# Altium PCB led_panel_181003.PcbDoc
Units mm, origin at the board's own origin, x right, y up, seen from the top; angles counter-clockwise.
Board outline 105.41 x 81.28 mm, 2 copper layers (Top Layer, Bottom Layer); 40 components, 39 nets, 915 pads, 13 vias.
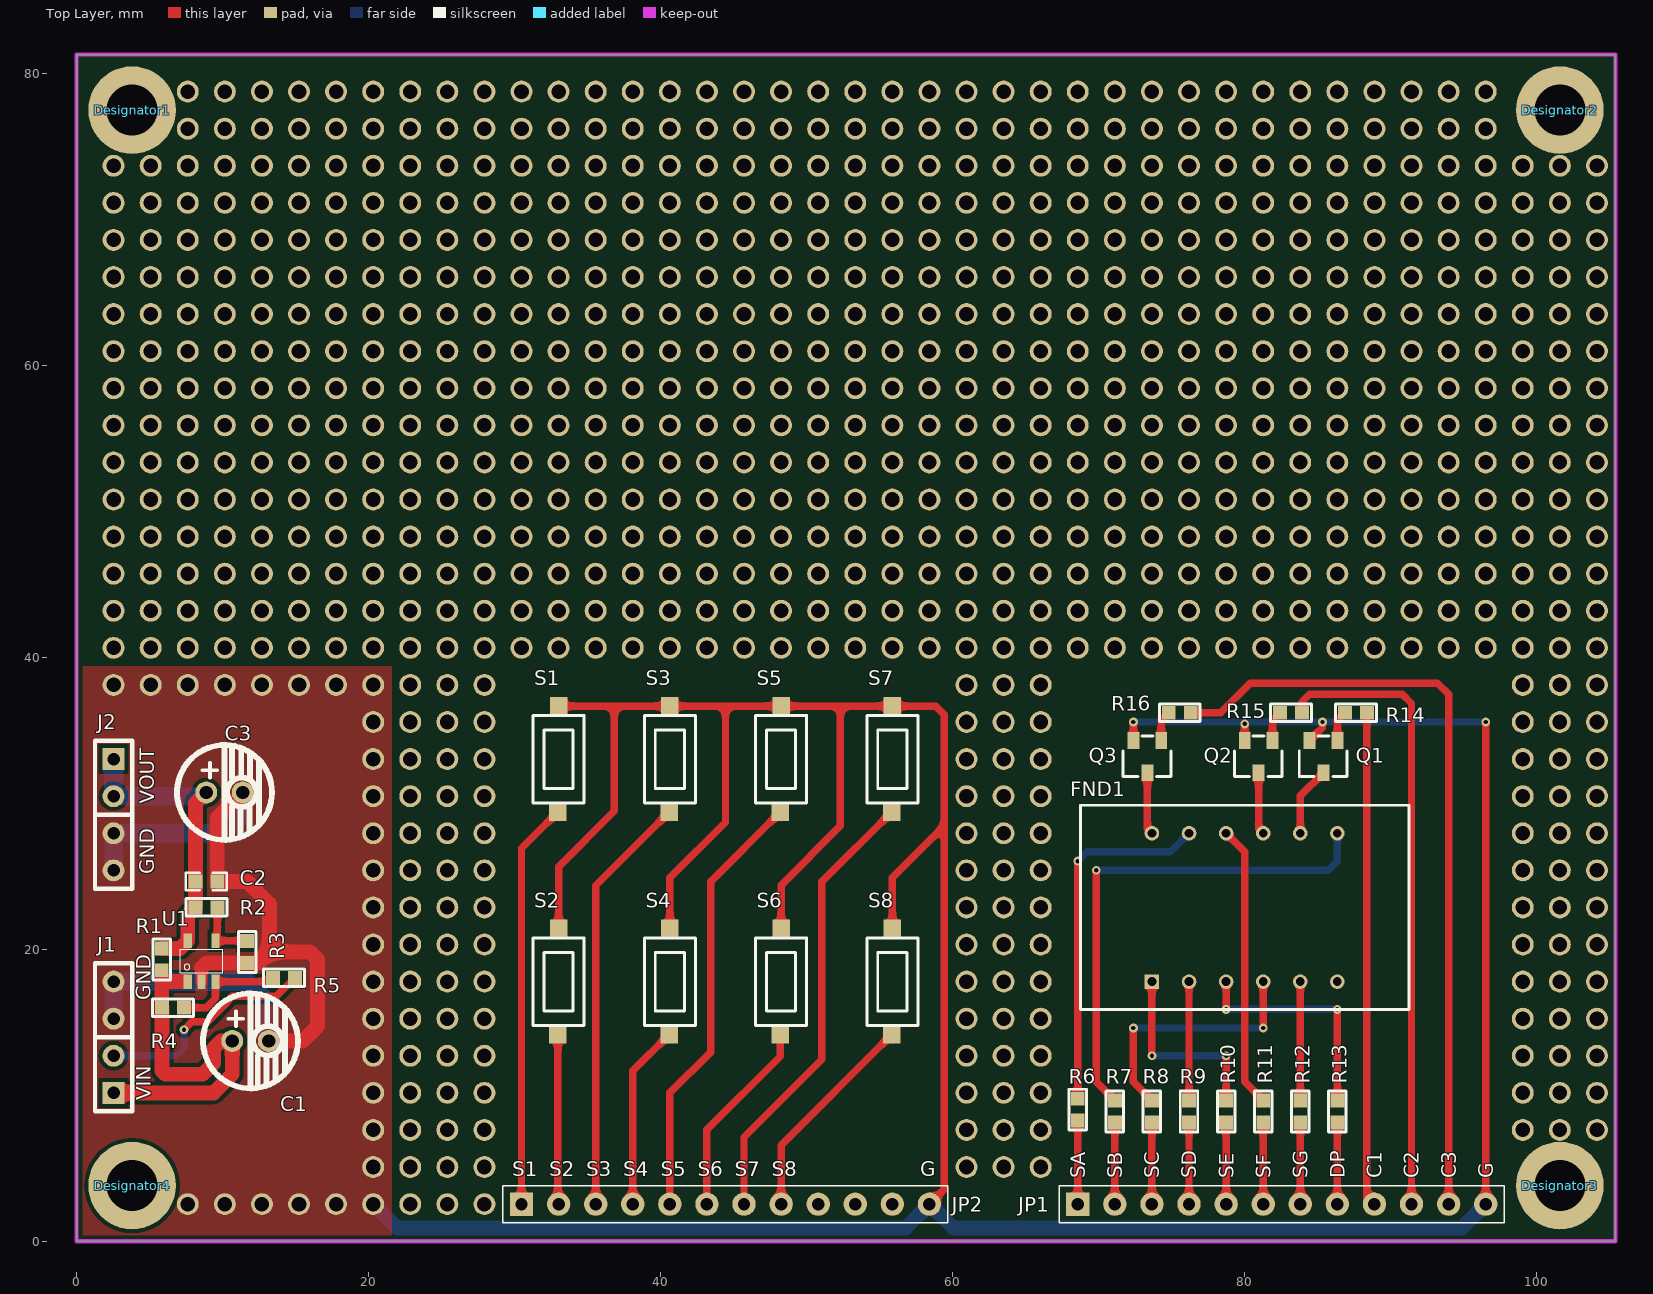
[diagram p0: Top Layer view]
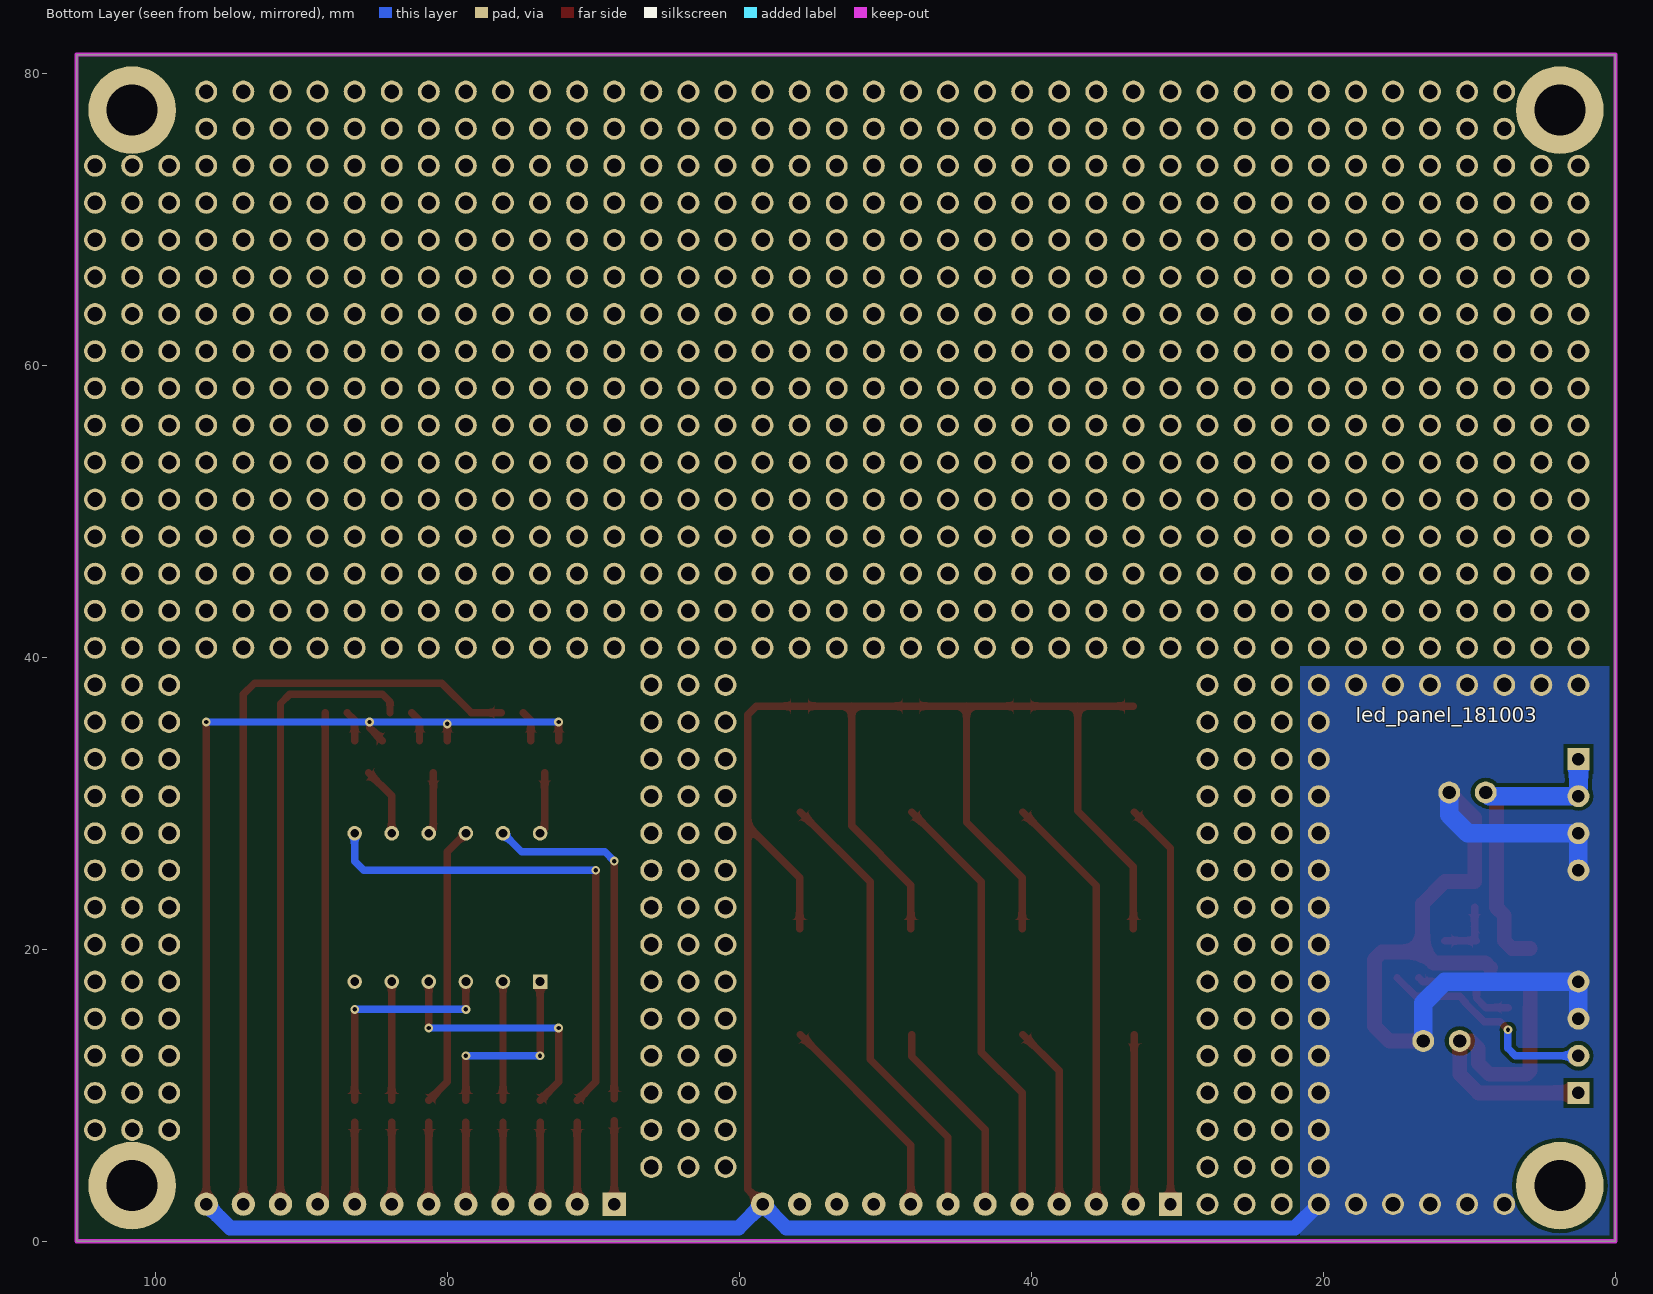
[diagram p1: Bottom Layer view, seen from below]
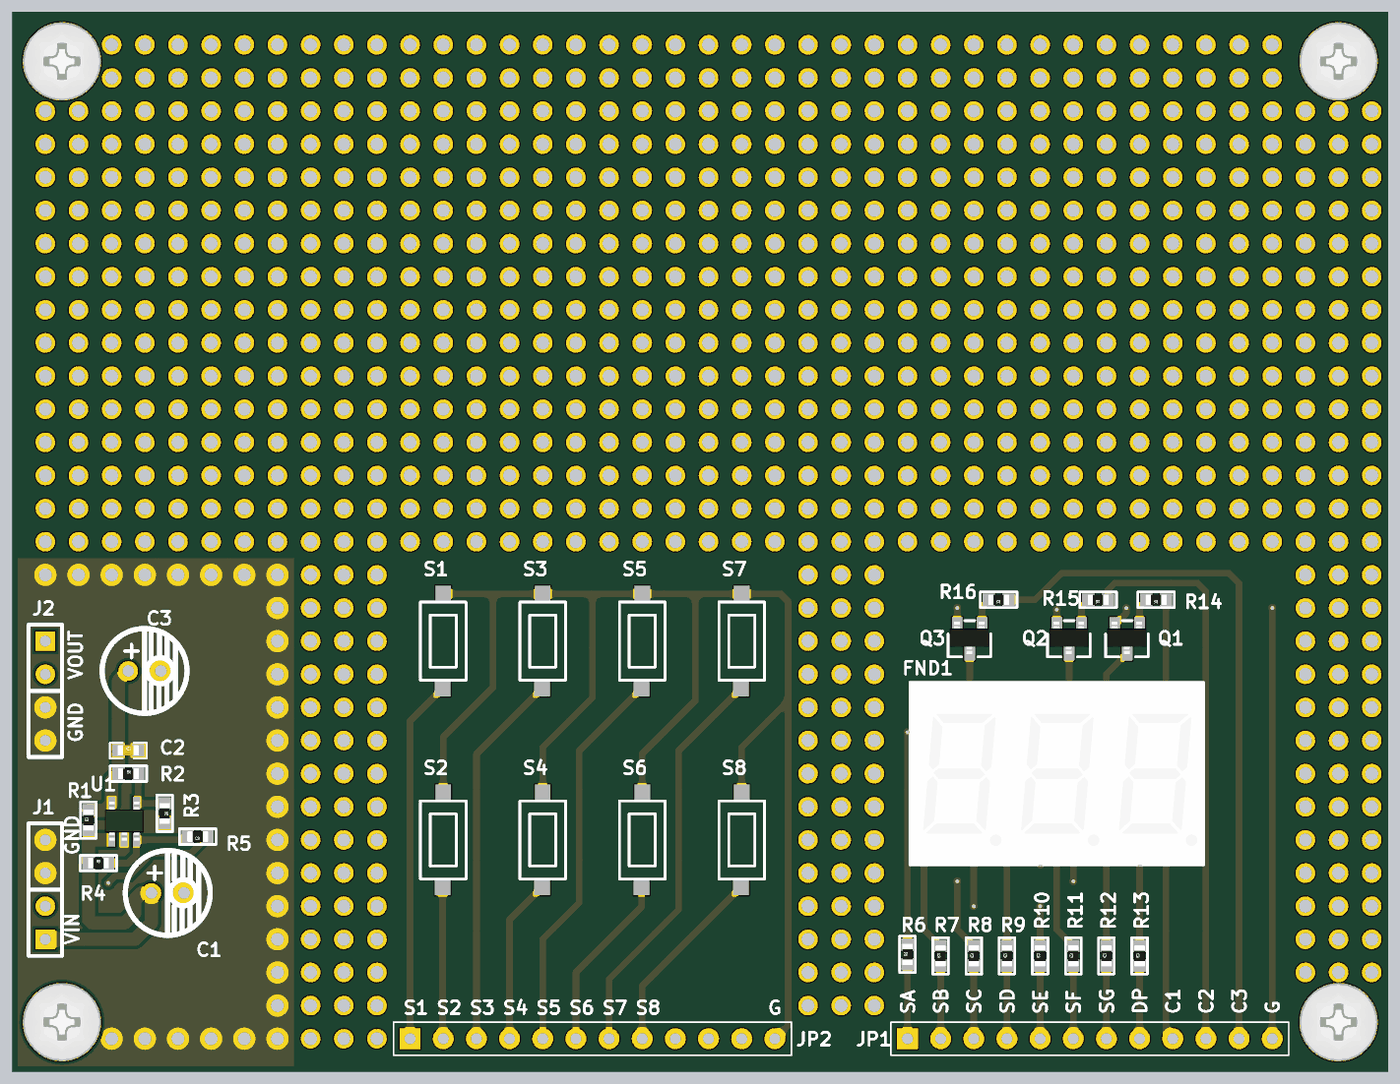
[diagram p2: 3D render of the assembled board from above, using the file's embedded part models]

## Layer stack, top to bottom
Top Solder: solder mask 0.0102, Solder Resist, Dk 3.5
Top Layer: signal copper 0.0356
Dielectric 1: dielectric 0.32, FR-4, Dk 4.8
Bottom Layer: signal copper 0.0356
Bottom Solder: solder mask 0.0102, Solder Resist, Dk 3.5

## Board outline
0,0 105.41,0 105.41,81.28 0,81.28

## Design rules (kind name [scope] priority, off if disabled: settings)
Clearance [All] p1: gap=0.254
PolygonConnect [All] p1: connectstyle=Direct reliefconductorwidth=0.254 reliefentries=4 polygonreliefangle="90 Angle" airgapwidth=0.254
RoutingVias [All] p1: holewidth=0.3 width=0.6 viastyle="Through Hole" minholewidth=0.3 minwidth=0.6 maxholewidth=2 maxwidth=3
SolderMaskExpansion [All] p1: expansion=0.102
Width [All] p1: maxlimit=2.54 minlimit=0.254 preferedwidth=0.254
30 further rules are at their usual default settings.

## Components (designator, comment, footprint, x,y, rotation, side; value= is the part's Value field where it differs from the comment)
C1 "10UF" CAPPRV250-650X1118 10.668,13.716 r0 top
C2 "10uF" C-0603 8.89,24.638 r0 top
C3 "10UF" CAPPRV250-650X1118 8.89,30.734 r0 top
Designator1 "Comment" CON1-M3 3.81,77.47 r0 top
Designator2 "Comment" CON1-M3 101.6,77.47 r0 top
Designator3 "Comment" CON1-M3 101.6,3.81 r0 top
Designator4 "Comment" CON1-M3 3.81,3.81 r0 top
FND1 "SP10262" D-7SEG-0.36-3DIG 80.01,22.86 r0 top
J1 "CON4, 2.54mm" CON-4X1-DIP-2.54mm 2.54,10.16 r270 top
J2 "CON4, 2.54mm" CON-4X1-DIP-2.54mm 2.54,33.02 r90 top
JP1 "CON12,2.54mm" CON-12X1-DIP-2.54mm 68.58,2.54 r0 top
JP2 "CON12,2.54mm" CON-12X1-DIP-2.54mm 30.48,2.54 r0 top
Q1 "MMBT4401" SOT-23-TR 85.41,33.179 r180 top
Q2 "MMBT4401" SOT-23-TR 80.965,33.179 r180 top
Q3 "MMBT4401" SOT-23-TR 73.345,33.179 r180 top
R1 "0R0" R-0603 5.842,19.304 r90 top
R2 "0R0" R-0603 8.902,22.86 r0 top
R3 "0R0" R-0603 11.684,19.812 r270 top
R4 "0R0" R-0603 6.604,16.002 r0 top
R5 "0R0" R-0603 14.212,18.034 r180 top
R6 "0R0" R-0603 68.58,9.005 r90 top
R7 "0R0" R-0603 71.12,8.89 r90 top
R8 "0R0" R-0603 73.66,8.89 r90 top
R9 "0R0" R-0603 76.2,8.89 r90 top
R10 "0R0" R-0603 78.74,8.89 r90 top
R11 "0R0" R-0603 81.28,8.89 r90 top
R12 "0R0" R-0603 83.82,8.89 r90 top
R13 "0R0" R-0603 86.36,8.89 r90 top
R14 "0R0" R-0603 87.63,36.195 r180 top
R15 "0R0" R-0603 83.185,36.195 r180 top
R16 "0R0" R-0603 75.565,36.195 r180 top
S1 "TS1101" SW-TS1101 33.02,33.02 r270 top
S2 "TS1101" SW-TS1101 33.02,17.78 r270 top
S3 "TS1101" SW-TS1101 40.64,33.02 r270 top
S4 "TS1101" SW-TS1101 40.64,17.78 r270 top
S5 "TS1101" SW-TS1101 48.26,33.02 r270 top
S6 "TS1101" SW-TS1101 48.26,17.78 r270 top
S7 "TS1101" SW-TS1101 55.88,33.02 r270 top
S8 "TS1101" SW-TS1101 55.88,17.78 r270 top
U1 "G2920T11" SOT-23-5 7.62,17.78 r0 top

## Footprints (in the part's own frame and the unit in brackets; to place one, negate y for a bottom-side part, rotate by r counter-clockwise, add the part's x,y. Pads: shape width x height; smd on the part's side, far side on the other; paste and mask are expansions set on the pad)
C-0603 [mm] "Chip Capacitor, Body 1.6x0.8mm, IPC High Density"
  rect 0.95x0.95 smd: 1(-0.75,0) 2(0.75,0)
  silkscreen extent -1.4,-0.6 1.4,0.6, body extent -0.8,-0.4 0.8,0.4, height 0.3
CAPPRV250-650X1118 [mm]
  round 1.5 hole 0.9: 1(0,0) 2(2.5,0)
  silkscreen extent -2,-3.25 4.5,3.25
CON1-M3 [mm] "M3 Hole"
  round 6 hole 3.5: 1(0,0)
  body extent -3,-3 3,3, height 2.36
CON-4X1-DIP-2.54mm [mm]
  rect 1.5x1.5 hole 0.85: 1(0,0)
  round 1.5 hole 0.85: 2(-2.54,0) 3(-5.08,0) 4(-7.62,0)
  silkscreen extent -8.89,-1.27 1.27,1.27
CON-12X1-DIP-2.54mm [mm]
  rect 1.6x1.6 hole 0.85: 1(0,0)
  round 1.6 hole 0.85: 2(2.54,0) 3(5.08,0) 4(7.62,0) 5(10.16,0) 6(12.7,0) 7(15.24,0) 8(17.78,0) 9(20.32,0) 10(22.86,0) 11(25.4,0) 12(27.94,0)
  silkscreen extent -1.27,-1.27 29.21,1.27
D-7SEG-0.36-3DIG [mm] "0.36 inch 3 digit LED, SP 10361"
  rect 1x1 hole 0.6 unplated: 1(-6.35,-5.08)
  round 1 hole 0.6 unplated: 2(-3.81,-5.08) 3(-1.27,-5.08) 4(1.27,-5.08) 5(3.81,-5.08) 6(6.35,-5.08) 7(6.35,5.08) 8(3.81,5.08) 9(1.27,5.08) 10(-1.27,5.08) 11(-3.81,5.08) 12(-6.35,5.08)
  silkscreen extent -11.25,-7 11.25,7, body extent -11.25,-7 11.25,7, height 7.2
R-0603 [mm]
  rect 0.95x0.95 smd: 1(-0.75,0) 2(0.75,0)
  silkscreen extent -1.4,-0.6 1.4,0.6, body extent -0.8,-0.4 0.8,0.4, height 0.3
SOT-23-5 [mm]
  rect 0.55x1 smd: 1(0,0) 2(0.95,0) 3(1.9,0) 4(1.9,2.8) 5(0,2.8)
  silkscreen extent -0.5,0.6 2.4,2.2, body extent -0.53,-0.05 2.47,2.95, height 1.5
SOT-23-TR [mil]
  rect 32x45 smd: 1(-37.41,-43.76) 2(37.39,-43.76) 3(-0.01,42.86)
  silkscreen extent -64,-55 65,54, body extent -58,-53 60,45, height 41
SW-TS1101 [mm] "6*3.5*4.3mm"
  rect 1.25x1.2 smd: 1(-3.625,0) 2(3.625,-0.05)
  silkscreen extent -3,-1.75 3,1.75, body extent -3,-1.75 3,1.73, height 4.3

## Free pads (board coordinates)
  round 1.5 hole 1: 2(2.54,38.1) 2(2.54,40.64) 2(2.54,43.18) 2(2.54,45.72) 2(2.54,48.26) 2(2.54,50.8) 2(2.54,53.34) 2(2.54,55.88) 2(2.54,58.42) 2(2.54,60.96) 2(2.54,63.5) 2(2.54,66.04) 2(2.54,68.58) 2(2.54,71.12) 2(2.54,73.66) 2(7.62,40.64) 2(7.62,43.18) 2(7.62,45.72) 2(7.62,48.26) 2(7.62,50.8) 2(7.62,53.34) 2(7.62,55.88) 2(7.62,58.42) 2(7.62,60.96) 2(7.62,63.5) 2(7.62,66.04) 2(7.62,68.58) 2(7.62,71.12) 2(7.62,73.66) 2(7.62,76.2) 2(7.62,78.74) 2(10.16,40.64) 2(10.16,43.18) 2(10.16,45.72) 2(10.16,48.26) 2(10.16,50.8) 2(10.16,53.34) 2(10.16,55.88) 2(10.16,58.42) 2(10.16,60.96) 2(10.16,63.5) 2(10.16,66.04) 2(10.16,68.58) 2(10.16,71.12) 2(10.16,73.66) 2(10.16,76.2) 2(10.16,78.74) 2(15.24,38.1) 2(22.86,2.54) 2(22.86,5.08) 2(22.86,7.62) 2(22.86,10.16) 2(22.86,12.7) 2(22.86,15.24) 2(22.86,17.78) 2(22.86,20.32) 2(22.86,22.86) 2(22.86,25.4) 2(22.86,27.94) 2(22.86,30.48) 2(22.86,33.02) 2(22.86,35.56) 2(22.86,38.1) 2(22.86,40.64) 2(22.86,43.18) 2(22.86,45.72) 2(22.86,48.26) 2(22.86,50.8) 2(22.86,53.34) 2(22.86,55.88) 2(22.86,58.42) 2(22.86,60.96) 2(22.86,63.5) 2(22.86,66.04) 2(22.86,68.58) 2(22.86,71.12) 2(22.86,73.66) 2(22.86,76.2) 2(22.86,78.74) 2(35.56,40.64) 2(35.56,43.18) 2(35.56,45.72) 2(35.56,48.26) 2(35.56,50.8) 2(35.56,53.34) 2(35.56,55.88) 2(35.56,58.42) 2(35.56,60.96) 2(35.56,63.5) 2(35.56,66.04) 2(35.56,68.58) 2(35.56,71.12) 2(35.56,73.66) 2(35.56,76.2) 2(35.56,78.74) 2(48.26,40.64) 2(48.26,43.18) 2(48.26,45.72) 2(48.26,48.26) 2(48.26,50.8) 2(48.26,53.34) 2(48.26,55.88) 2(48.26,58.42) 2(48.26,60.96) 2(48.26,63.5) 2(48.26,66.04) 2(48.26,68.58) 2(48.26,71.12) 2(48.26,73.66) 2(48.26,76.2) 2(48.26,78.74) 2(60.96,5.08) 2(60.96,7.62) 2(60.96,10.16) 2(60.96,12.7) 2(60.96,15.24) 2(60.96,17.78) 2(60.96,20.32) 2(60.96,22.86) 2(60.96,25.4) 2(60.96,27.94) 2(60.96,30.48) 2(60.96,33.02) 2(60.96,35.56) 2(60.96,38.1) 2(60.96,40.64) 2(60.96,43.18) 2(60.96,45.72) 2(60.96,48.26) 2(60.96,50.8) 2(60.96,53.34) 2(60.96,55.88) 2(60.96,58.42) 2(60.96,60.96) 2(60.96,63.5) 2(60.96,66.04) 2(60.96,68.58) 2(60.96,71.12) 2(60.96,73.66) 2(60.96,76.2) 2(60.96,78.74) 2(73.66,40.64) 2(73.66,43.18) 2(73.66,45.72) 2(73.66,48.26) 2(73.66,50.8) 2(73.66,53.34) 2(73.66,55.88) 2(73.66,58.42) 2(73.66,60.96) 2(73.66,63.5) 2(73.66,66.04) 2(73.66,68.58) 2(73.66,71.12) 2(73.66,73.66) 2(73.66,76.2) 2(73.66,78.74) 2(86.36,40.64) 2(86.36,43.18) 2(86.36,45.72) 2(86.36,48.26) 2(86.36,50.8) 2(86.36,53.34) 2(86.36,55.88) 2(86.36,58.42) 2(86.36,60.96) 2(86.36,63.5) 2(86.36,66.04) 2(86.36,68.58) 2(86.36,71.12) 2(86.36,73.66) 2(86.36,76.2) 2(86.36,78.74) 2(99.06,7.62) 2(99.06,10.16) 2(99.06,12.7) 2(99.06,15.24) 2(99.06,17.78) 2(99.06,20.32) 2(99.06,22.86) 2(99.06,25.4) 2(99.06,27.94) 2(99.06,30.48) 2(99.06,33.02) 2(99.06,35.56) 2(99.06,38.1) 2(99.06,40.64) 2(99.06,43.18) 2(99.06,45.72) 2(99.06,48.26) 2(99.06,50.8) 2(99.06,53.34) 2(99.06,55.88) 2(99.06,58.42) 2(99.06,60.96) 2(99.06,63.5) 2(99.06,66.04) 2(99.06,68.58) 2(99.06,71.12) 2(99.06,73.66) 2(101.6,7.62) 2(101.6,10.16) 2(101.6,12.7) 2(101.6,15.24) 2(101.6,17.78) 2(101.6,20.32) 2(101.6,22.86) 2(101.6,25.4) 2(101.6,27.94) 2(101.6,30.48) 2(101.6,33.02) 2(101.6,35.56) 2(101.6,38.1) 2(101.6,40.64) 2(101.6,43.18) 2(101.6,45.72) 2(101.6,48.26) 2(101.6,50.8) 2(101.6,53.34) 2(101.6,55.88) 2(101.6,58.42) 2(101.6,60.96) 2(101.6,63.5) 2(101.6,66.04) 2(101.6,68.58) 2(101.6,71.12) 2(101.6,73.66) 2(104.14,7.62) 2(104.14,10.16) 2(104.14,12.7) 2(104.14,15.24) 2(104.14,17.78) 2(104.14,20.32) 2(104.14,22.86) 2(104.14,25.4) 2(104.14,27.94) 2(104.14,30.48) 2(104.14,33.02) 2(104.14,35.56) 2(104.14,38.1) 2(104.14,40.64) 2(104.14,43.18) 2(104.14,45.72) 2(104.14,48.26) 2(104.14,50.8) 2(104.14,53.34) 2(104.14,55.88) 2(104.14,58.42) 2(104.14,60.96) 2(104.14,63.5) 2(104.14,66.04) 2(104.14,68.58) 2(104.14,71.12) 2(104.14,73.66) 3(5.08,38.1) 3(5.08,40.64) 3(5.08,43.18) 3(5.08,45.72) 3(5.08,48.26) 3(5.08,50.8) 3(5.08,53.34) 3(5.08,55.88) 3(5.08,58.42) 3(5.08,60.96) 3(5.08,63.5) 3(5.08,66.04) 3(5.08,68.58) 3(5.08,71.12) 3(5.08,73.66) 3(12.7,40.64) 3(12.7,43.18) 3(12.7,45.72) 3(12.7,48.26) 3(12.7,50.8) 3(12.7,53.34) 3(12.7,55.88) 3(12.7,58.42) 3(12.7,60.96) 3(12.7,63.5) 3(12.7,66.04) 3(12.7,68.58) 3(12.7,71.12) 3(12.7,73.66) 3(12.7,76.2) 3(12.7,78.74) 3(17.78,38.1) 3(25.4,2.54) 3(25.4,5.08) 3(25.4,7.62) 3(25.4,10.16) 3(25.4,12.7) 3(25.4,15.24) 3(25.4,17.78) 3(25.4,20.32) 3(25.4,22.86) 3(25.4,25.4) 3(25.4,27.94) 3(25.4,30.48) 3(25.4,33.02) 3(25.4,35.56) 3(25.4,38.1) 3(25.4,40.64) 3(25.4,43.18) 3(25.4,45.72) 3(25.4,48.26) 3(25.4,50.8) 3(25.4,53.34) 3(25.4,55.88) 3(25.4,58.42) 3(25.4,60.96) 3(25.4,63.5) 3(25.4,66.04) 3(25.4,68.58) 3(25.4,71.12) 3(25.4,73.66) 3(25.4,76.2) 3(25.4,78.74) 3(38.1,40.64) 3(38.1,43.18) 3(38.1,45.72) 3(38.1,48.26) 3(38.1,50.8) 3(38.1,53.34) 3(38.1,55.88) 3(38.1,58.42) 3(38.1,60.96) 3(38.1,63.5) 3(38.1,66.04) 3(38.1,68.58) 3(38.1,71.12) 3(38.1,73.66) 3(38.1,76.2) 3(38.1,78.74) 3(50.8,40.64) 3(50.8,43.18) 3(50.8,45.72) 3(50.8,48.26) 3(50.8,50.8) 3(50.8,53.34) 3(50.8,55.88) 3(50.8,58.42) 3(50.8,60.96) 3(50.8,63.5) 3(50.8,66.04) 3(50.8,68.58) 3(50.8,71.12) 3(50.8,73.66) 3(50.8,76.2) 3(50.8,78.74) 3(63.5,5.08) 3(63.5,7.62) 3(63.5,10.16) 3(63.5,12.7) 3(63.5,15.24) 3(63.5,17.78) 3(63.5,20.32) 3(63.5,22.86) 3(63.5,25.4) 3(63.5,27.94) 3(63.5,30.48) 3(63.5,33.02) 3(63.5,35.56) 3(63.5,38.1) 3(63.5,40.64) 3(63.5,43.18) 3(63.5,45.72) 3(63.5,48.26) 3(63.5,50.8) 3(63.5,53.34) 3(63.5,55.88) 3(63.5,58.42) 3(63.5,60.96) 3(63.5,63.5) 3(63.5,66.04) 3(63.5,68.58) 3(63.5,71.12) 3(63.5,73.66) 3(63.5,76.2) 3(63.5,78.74) 3(76.2,40.64) 3(76.2,43.18) 3(76.2,45.72) 3(76.2,48.26) 3(76.2,50.8) 3(76.2,53.34) 3(76.2,55.88) 3(76.2,58.42) 3(76.2,60.96) 3(76.2,63.5) 3(76.2,66.04) 3(76.2,68.58) 3(76.2,71.12) 3(76.2,73.66) 3(76.2,76.2) 3(76.2,78.74) 3(88.9,40.64) 3(88.9,43.18) 3(88.9,45.72) 3(88.9,48.26) 3(88.9,50.8) 3(88.9,53.34) 3(88.9,55.88) 3(88.9,58.42) 3(88.9,60.96) 3(88.9,63.5) 3(88.9,66.04) 3(88.9,68.58) 3(88.9,71.12) 3(88.9,73.66) 3(88.9,76.2) 3(88.9,78.74) 4(7.62,38.1) 4(15.24,40.64) 4(15.24,43.18) 4(15.24,45.72) 4(15.24,48.26) 4(15.24,50.8) 4(15.24,53.34) 4(15.24,55.88) 4(15.24,58.42) 4(15.24,60.96) 4(15.24,63.5) 4(15.24,66.04) 4(15.24,68.58) 4(15.24,71.12) 4(15.24,73.66) 4(15.24,76.2) 4(15.24,78.74) 4(20.32,38.1) 4(27.94,2.54) 4(27.94,5.08) 4(27.94,7.62) 4(27.94,10.16) 4(27.94,12.7) 4(27.94,15.24) 4(27.94,17.78) 4(27.94,20.32) 4(27.94,22.86) 4(27.94,25.4) 4(27.94,27.94) 4(27.94,30.48) 4(27.94,33.02) 4(27.94,35.56) 4(27.94,38.1) 4(27.94,40.64) 4(27.94,43.18) 4(27.94,45.72) 4(27.94,48.26) 4(27.94,50.8) 4(27.94,53.34) 4(27.94,55.88) 4(27.94,58.42) 4(27.94,60.96) 4(27.94,63.5) 4(27.94,66.04) 4(27.94,68.58) 4(27.94,71.12) 4(27.94,73.66) 4(27.94,76.2) 4(27.94,78.74) 4(40.64,40.64) 4(40.64,43.18) 4(40.64,45.72) 4(40.64,48.26) 4(40.64,50.8) 4(40.64,53.34) 4(40.64,55.88) 4(40.64,58.42) 4(40.64,60.96) 4(40.64,63.5) 4(40.64,66.04) 4(40.64,68.58) 4(40.64,71.12) 4(40.64,73.66) 4(40.64,76.2) 4(40.64,78.74) 4(53.34,40.64) 4(53.34,43.18) 4(53.34,45.72) 4(53.34,48.26) 4(53.34,50.8) 4(53.34,53.34) 4(53.34,55.88) 4(53.34,58.42) 4(53.34,60.96) 4(53.34,63.5) 4(53.34,66.04) 4(53.34,68.58) 4(53.34,71.12) 4(53.34,73.66) 4(53.34,76.2) 4(53.34,78.74) 4(66.04,5.08) 4(66.04,7.62) 4(66.04,10.16) 4(66.04,12.7) 4(66.04,15.24) 4(66.04,17.78) 4(66.04,20.32) 4(66.04,22.86) 4(66.04,25.4) 4(66.04,27.94) 4(66.04,30.48) 4(66.04,33.02) 4(66.04,35.56) 4(66.04,38.1) 4(66.04,40.64) 4(66.04,43.18) 4(66.04,45.72) 4(66.04,48.26) 4(66.04,50.8) 4(66.04,53.34) 4(66.04,55.88) 4(66.04,58.42) 4(66.04,60.96) 4(66.04,63.5) 4(66.04,66.04) 4(66.04,68.58) 4(66.04,71.12) 4(66.04,73.66) 4(66.04,76.2) 4(66.04,78.74) 4(78.74,40.64) 4(78.74,43.18) 4(78.74,45.72) 4(78.74,48.26) 4(78.74,50.8) 4(78.74,53.34) 4(78.74,55.88) 4(78.74,58.42) 4(78.74,60.96) 4(78.74,63.5) 4(78.74,66.04) 4(78.74,68.58) 4(78.74,71.12) 4(78.74,73.66) 4(78.74,76.2) 4(78.74,78.74) 4(91.44,40.64) 4(91.44,43.18) 4(91.44,45.72) 4(91.44,48.26) 4(91.44,50.8) 4(91.44,53.34) 4(91.44,55.88) 4(91.44,58.42) 4(91.44,60.96) 4(91.44,63.5) 4(91.44,66.04) 4(91.44,68.58) 4(91.44,71.12) 4(91.44,73.66) 4(91.44,76.2) 4(91.44,78.74) 5(10.16,38.1) 5(17.78,40.64) 5(17.78,43.18) 5(17.78,45.72) 5(17.78,48.26) 5(17.78,50.8) 5(17.78,53.34) 5(17.78,55.88) 5(17.78,58.42) 5(17.78,60.96) 5(17.78,63.5) 5(17.78,66.04) 5(17.78,68.58) 5(17.78,71.12) 5(17.78,73.66) 5(17.78,76.2) 5(17.78,78.74) 5(30.48,40.64) 5(30.48,43.18) 5(30.48,45.72) 5(30.48,48.26) 5(30.48,50.8) 5(30.48,53.34) 5(30.48,55.88) 5(30.48,58.42) 5(30.48,60.96) 5(30.48,63.5) 5(30.48,66.04) 5(30.48,68.58) 5(30.48,71.12) 5(30.48,73.66) 5(30.48,76.2) 5(30.48,78.74) 5(43.18,40.64) 5(43.18,43.18) 5(43.18,45.72) 5(43.18,48.26) 5(43.18,50.8) 5(43.18,53.34) 5(43.18,55.88) 5(43.18,58.42) 5(43.18,60.96) 5(43.18,63.5) 5(43.18,66.04) 5(43.18,68.58) 5(43.18,71.12) 5(43.18,73.66) 5(43.18,76.2) 5(43.18,78.74) 5(55.88,40.64) 5(55.88,43.18) 5(55.88,45.72) 5(55.88,48.26) 5(55.88,50.8) 5(55.88,53.34) 5(55.88,55.88) 5(55.88,58.42) 5(55.88,60.96) 5(55.88,63.5) 5(55.88,66.04) 5(55.88,68.58) 5(55.88,71.12) 5(55.88,73.66) 5(55.88,76.2) 5(55.88,78.74) 5(68.58,40.64) 5(68.58,43.18) 5(68.58,45.72) 5(68.58,48.26) 5(68.58,50.8) 5(68.58,53.34) 5(68.58,55.88) 5(68.58,58.42) 5(68.58,60.96) 5(68.58,63.5) 5(68.58,66.04) 5(68.58,68.58) 5(68.58,71.12) 5(68.58,73.66) 5(68.58,76.2) 5(68.58,78.74) 5(81.28,40.64) 5(81.28,43.18) 5(81.28,45.72) 5(81.28,48.26) 5(81.28,50.8) 5(81.28,53.34) 5(81.28,55.88) 5(81.28,58.42) 5(81.28,60.96) 5(81.28,63.5) 5(81.28,66.04) 5(81.28,68.58) 5(81.28,71.12) 5(81.28,73.66) 5(81.28,76.2) 5(81.28,78.74) 5(93.98,40.64) 5(93.98,43.18) 5(93.98,45.72) 5(93.98,48.26) 5(93.98,50.8) 5(93.98,53.34) 5(93.98,55.88) 5(93.98,58.42) 5(93.98,60.96) 5(93.98,63.5) 5(93.98,66.04) 5(93.98,68.58) 5(93.98,71.12) 5(93.98,73.66) 5(93.98,76.2) 5(93.98,78.74) 6(12.7,38.1) 6(20.32,40.64) 6(20.32,43.18) 6(20.32,45.72) 6(20.32,48.26) 6(20.32,50.8) 6(20.32,53.34) 6(20.32,55.88) 6(20.32,58.42) 6(20.32,60.96) 6(20.32,63.5) 6(20.32,66.04) 6(20.32,68.58) 6(20.32,71.12) 6(20.32,73.66) 6(20.32,76.2) 6(20.32,78.74) 6(33.02,40.64) 6(33.02,43.18) 6(33.02,45.72) 6(33.02,48.26) 6(33.02,50.8) 6(33.02,53.34) 6(33.02,55.88) 6(33.02,58.42) 6(33.02,60.96) 6(33.02,63.5) 6(33.02,66.04) 6(33.02,68.58) 6(33.02,71.12) 6(33.02,73.66) 6(33.02,76.2) 6(33.02,78.74) 6(45.72,40.64) 6(45.72,43.18) 6(45.72,45.72) 6(45.72,48.26) 6(45.72,50.8) 6(45.72,53.34) 6(45.72,55.88) 6(45.72,58.42) 6(45.72,60.96) 6(45.72,63.5) 6(45.72,66.04) 6(45.72,68.58) 6(45.72,71.12) 6(45.72,73.66) 6(45.72,76.2) 6(45.72,78.74) 6(58.42,40.64) 6(58.42,43.18) 6(58.42,45.72) 6(58.42,48.26) 6(58.42,50.8) 6(58.42,53.34) 6(58.42,55.88) 6(58.42,58.42) 6(58.42,60.96) 6(58.42,63.5) 6(58.42,66.04) 6(58.42,68.58) 6(58.42,71.12) 6(58.42,73.66) 6(58.42,76.2) 6(58.42,78.74) 6(71.12,40.64) 6(71.12,43.18) 6(71.12,45.72) 6(71.12,48.26) 6(71.12,50.8) 6(71.12,53.34) 6(71.12,55.88) 6(71.12,58.42) 6(71.12,60.96) 6(71.12,63.5) 6(71.12,66.04) 6(71.12,68.58) 6(71.12,71.12) 6(71.12,73.66) 6(71.12,76.2) 6(71.12,78.74) 6(83.82,40.64) 6(83.82,43.18) 6(83.82,45.72) 6(83.82,48.26) 6(83.82,50.8) 6(83.82,53.34) 6(83.82,55.88) 6(83.82,58.42) 6(83.82,60.96) 6(83.82,63.5) 6(83.82,66.04) 6(83.82,68.58) 6(83.82,71.12) 6(83.82,73.66) 6(83.82,76.2) 6(83.82,78.74) 6(96.52,40.64) 6(96.52,43.18) 6(96.52,45.72) 6(96.52,48.26) 6(96.52,50.8) 6(96.52,53.34) 6(96.52,55.88) 6(96.52,58.42) 6(96.52,60.96) 6(96.52,63.5) 6(96.52,66.04) 6(96.52,68.58) 6(96.52,71.12) 6(96.52,73.66) 6(96.52,76.2) 6(96.52,78.74) 9(20.32,35.56) 10(20.32,33.02) 11(20.32,30.48) 12(20.32,27.94) 13(20.32,25.4) 14(20.32,22.86) 15(20.32,20.32) 16(20.32,17.78) 17(20.32,15.24) 18(20.32,12.7) 19(20.32,10.16) 21(20.32,7.62) 22(20.32,5.08) 23(20.32,2.54) 24(17.78,2.54) 25(15.24,2.54) 26(12.7,2.54) 27(10.16,2.54) 28(7.62,2.54)

## Via types
v1: diameter 0.6, hole 0.3, Top Layer to Bottom Layer, tented both sides, 13 vias

## Nets (pads, with @x,y where several pads share a name; then routed paths per layer and width w, separated by ;. In a path a pad name is that pad's centre, name@x,y a point inside that pad or via, vN(x,y) a via of type N, cw(c..) or ccw(c..) an arc to the next point about the centre after c; other vN are vias at no path point)
C1: JP1.11 R16.1 | length 53.7
  Top Layer w0.508: R16.1 78.359,36.195 80.391,38.227 93.218,38.227 93.98,37.465 JP1.11
C2: JP1.10 R15.1 | length 43
  Top Layer w0.508: R15.1 83.935,36.945 84.455,37.465 90.805,37.465 91.44,36.83 JP1.10
C3: JP1.9 R14.1 | length 33.9
  Top Layer w0.508: R14.1 88.38,3.06 JP1.9
EN: R4.2 R5.2 U1.3 | length 7.6
  Top Layer w0.508: R4.2 8.89,16.002 9.52,16.632 U1.3 13.208,17.78 R5.2
ENA: J1.2 R5.1 | length 15.4
  Top Layer w0.508: v1(7.366,14.478) 7.907,15.019 8.985,15.019 10.282,16.316 10.282,16.378 10.668,16.764 13.692,16.764 R5.1
  Bottom Layer w0.508: J1.2 6.858,12.7 7.366,13.208 v1(7.366,14.478)
FB: R2.2 R3.1 U1.4 | length 4.5
  Top Layer w0.508: R2.2 9.652,20.712 U1.4 11.666,20.58 R3.1
GND_SIGNAL: C1.2 C2.2 C3.2 J1.3 J1.4 J2.3 J2.4 JP1.12 JP2.12 pad.2@2.54,38.1 pad.2@15.24,38.1 pad.3@5.08,38.1 pad.3@17.78,38.1 pad.4@7.62,38.1 pad.4@20.32,38.1 pad.5@10.16,38.1 pad.6@12.7,38.1 pad.9 pad.10 pad.11 pad.12 pad.13 pad.14 pad.15 pad.16 pad.17 pad.18 pad.19 pad.21 pad.22 pad.23 pad.24 pad.25 pad.26 pad.27 pad.28 Q1.2 Q2.2 Q3.2 R3.2 S1.1 S2.1 S3.1 S4.1 S5.1 S6.1 S7.1 S8.1 U1.2 | length 321.9
  Top Layer w0.508: S2.1 33.02,25.654 36.83,29.464 36.83,36.645 ; S1.1 36.83,36.645 ; S4.1 40.64,24.892 44.45,28.702 44.45,36.645 ; S6.1 48.26,24.384 52.324,28.448 52.324,36.645 ; S8.1 55.88,24.892 59.436,28.448 ; JP2.12 59.436,3.556 59.436,28.448 ; v1(72.39,35.56) 72.39,34.295 Q3.2 ; v1(80.01,35.433) 80.015,35.428 Q2.2 ; Q1.2 85.344,35.174 v1(85.344,35.56) ; JP1.12 v1(96.52,35.56) ; 36.83,36.645 S3.1 44.45,36.645 ; 44.45,36.645 S5.1 52.324,36.645 ; 52.324,36.645 S7.1 58.859,36.645 59.436,36.068 59.436,28.448
  Top Layer w0.762: U1.2 8.57,18.73
  Top Layer w1.016: 8.57,18.73 8.902,19.062 R3.2 12.458,19.062 13.208,19.812 ; C3.2 9.64,28.984 C2.2 11.684,24.638 13.208,23.114 13.208,19.812 ; C1.2 15.494,13.716 16.51,14.732 16.51,19.304 16.002,19.812 13.208,19.812
  Bottom Layer w0.508: v1(72.39,35.56) v1@80.01,35.56 ; v1(80.01,35.433) v1@80.01,35.56 ; v1(96.52,35.56) v1(85.344,35.56) v1@80.01,35.56
  Bottom Layer w1.016: pad.23 21.948,0.912 56.792,0.912 JP2.12 60.048,0.912 94.892,0.912 JP1.12
  Bottom Layer w1.27: J1.3 J1.4 11.684,17.78 13.168,16.296 C1.2 ; J2.4 J2.3 10.12,27.94 11.39,29.21 C3.2
N11778: FND1.12 Q3.3 | length 4.3
  Top Layer w0.508: Q3.3 73.345,28.255 FND1.12
N11782: FND1.9 Q2.3 | length 4.3
  Top Layer w0.508: Q2.3 80.965,28.255 FND1.9
N11786: FND1.8 Q1.3 | length 4.8
  Top Layer w0.508: FND1.8 83.82,30.5 Q1.3
N12331: FND1.11 R6.2 | length 24.7
  Top Layer w0.508: R6.2 v1(68.58,26.035)
  Bottom Layer w0.508: v1(68.58,26.035) 69.215,26.67 74.93,26.67 FND1.11
N12607: FND1.7 R7.2 | length 35
  Top Layer w0.508: v1(69.85,25.4) 69.85,10.91 R7.2
  Bottom Layer w0.508: v1(69.85,25.4) 85.725,25.4 86.36,26.035 FND1.7
N12611: FND1.4 R8.2 | length 17.6
  Top Layer w0.508: v1(72.39,14.605) 72.39,10.91 R8.2 ; v1(81.28,14.605) FND1.4
  Bottom Layer w0.508: v1(72.39,14.605) v1(81.28,14.605)
N12615: FND1.2 R9.2 | length 8.1
  Top Layer w0.508: R9.2 FND1.2
N12619: FND1.1 R10.2 | length 13.2
  Top Layer w0.508: v1(73.66,12.7) FND1.1 ; R10.2 v1(78.74,12.7)
  Bottom Layer w0.508: v1(73.66,12.7) v1(78.74,12.7)
N12632: FND1.10 R11.2 | length 19.4
  Top Layer w0.508: FND1.10 80.01,26.67 80.01,10.91 R11.2
N12636: FND1.5 R12.2 | length 8.1
  Top Layer w0.508: R12.2 FND1.5
N12640: FND1.3 R13.2 | length 15.8
  Top Layer w0.508: v1(78.74,15.875) FND1.3 ; R13.2 v1(86.36,15.875)
  Bottom Layer w0.508: v1(78.74,15.875) v1(86.36,15.875)
N128070: Q1.1 R14.2 | length 2.1
  Top Layer w0.508: Q1.1 86.36,35.675 R14.2
N131941: Q2.1 R15.2 | length 2.1
  Top Layer w0.508: Q2.1 81.915,35.675 R15.2
N132601: Q3.1 R16.2 | length 2.1
  Top Layer w0.508: Q3.1 74.295,35.675 R16.2
S1: JP2.1 S1.2 | length 28.6
  Top Layer w0.508: JP2.1@29.972,3.048 JP2.1 30.48,26.905 S1.2
S2: JP2.2 S2.2 | length 11.6
  Top Layer w0.508: S2.2 32.97,2.59 JP2.2
S3: JP2.3 S3.2 | length 28.9
  Top Layer w0.508: JP2.3 35.56,24.365 S3.2
S4: JP2.4 S4.2 | length 12.6
  Top Layer w0.508: JP2.4 38.1,11.665 S4.2
S5: JP2.5 S5.2 | length 30
  Top Layer w0.508: JP2.5 40.64,10.16 43.434,12.954 43.434,24.619 S5.2
S6: JP2.6 S6.2 | length 13.7
  Top Layer w0.508: JP2.6 43.18,7.62 48.21,12.65 S6.2
S7: JP2.7 S7.2 | length 31
  Top Layer w0.508: JP2.7 45.72,7.112 51.054,12.446 51.054,24.619 S7.2
S8: JP2.8 S8.2 | length 14.8
  Top Layer w0.508: JP2.8 48.26,6.585 S8.2
SA: JP1.1 R6.1 | length 5.7
  Top Layer w0.508: JP1.1 R6.1
SB: JP1.2 R7.1 | length 5.6
  Top Layer w0.508: JP1.2 R7.1
SC: JP1.3 R8.1 | length 5.6
  Top Layer w0.508: JP1.3 R8.1
SD: JP1.4 R9.1 | length 5.6
  Top Layer w0.508: JP1.4 R9.1
SDP: JP1.8 R13.1 | length 5.6
  Top Layer w0.508: JP1.8 R13.1
SE: JP1.5 R10.1 | length 5.6
  Top Layer w0.508: JP1.5 R10.1
SF: JP1.6 R11.1 | length 5.6
  Top Layer w0.508: JP1.6 R11.1
SG: JP1.7 R12.1 | length 5.6
  Top Layer w0.508: JP1.7 R12.1
VCC: C1.1 J1.1 R1.1 R4.1 U1.1 | length 25
  Top Layer w1.016: J1.1 9.398,10.16 10.668,11.43 C1.1 9.906,13.716 9.398,13.208 9.398,12.192 8.636,11.43 6.096,11.43 5.854,11.672 R4.1 5.842,16.014 5.842,17.78 U1.1@7.366,17.78
VDD_5V: C2.1 C3.1 J2.1 J2.2 R1.2 R2.1 U1.5 | length 21.7
  Top Layer w1.016: R1.2 7.094,20.054 U1.5 7.62,22.328 R2.1 8.152,24.626 C2.1 8.14,29.984 C3.1
  Bottom Layer w1.27: J2.1 J2.2 8.636,30.48 C3.1
pads on no net: Designator1.1 Designator2.1 Designator3.1 Designator4.1 FND1.6 JP2.9 JP2.10 JP2.11

## Polygon pours and split planes (outlines as drawn)
GND_SIGNAL on Bottom Layer "Top Layer-No Net" (solid, remove dead copper, pour order 0): 0,0 0,39.37 21.59,39.37 21.59,0
GND_SIGNAL on Top Layer "Top Layer-No Net" (solid, remove dead copper, pour order 2): 0,39.37 21.59,39.37 21.59,0 0,0

## Keep-outs
Keep-Out Layer:
  the board outline again, w0.3

## Silkscreen, mask and mechanical layers (free items; w line width, h text height)
Top Overlay:
  lines w0.3: 1.27,13.97 3.81,13.97 ; 1.27,29.21 3.81,29.21 ; 1.27,8.89 3.81,8.89 3.81,19.05 1.27,19.05 1.27,8.89 ; 1.27,24.13 1.27,34.29 3.81,34.29 3.81,24.13 1.27,24.13
  text "VOUT" at 5.334,29.972 h1 r90
  text "GND" at 5.334,25.146 h1 r90
  text "GND" at 5.08,16.51 h1 r90
  text "VIN" at 5.08,9.652 h1 r90
  text "S1" at 29.845,4.445 h1
  text "S2" at 32.385,4.445 h1
  text "S3" at 34.925,4.445 h1
  text "S4" at 37.465,4.445 h1
  text "S5" at 40.005,4.445 h1
  text "S6" at 42.545,4.445 h1
  text "S7" at 45.085,4.445 h1
  text "S8" at 47.625,4.445 h1
  text "G" at 57.785,4.445 h1
  text "SA" at 69.088,4.318 h1 r90
  text "SB" at 71.628,4.318 h1 r90
  text "SC" at 74.168,4.318 h1 r90
  text "SD" at 76.708,4.318 h1 r90
  text "SE" at 79.248,4.318 h1 r90
  text "SF" at 81.788,4.318 h1 r90
  text "SG" at 84.328,4.318 h1 r90
  text "DP" at 86.868,4.318 h1 r90
  text "C1" at 89.408,4.318 h1 r90
  text "C2" at 91.948,4.318 h1 r90
  text "C3" at 94.488,4.318 h1 r90
  text "G" at 97.028,4.318 h1 r90
Bottom Overlay:
  text "led_panel_181003" at 17.78,35.56 h1